# EAGLE board buzzer2 (EAGLE 9.5.2)
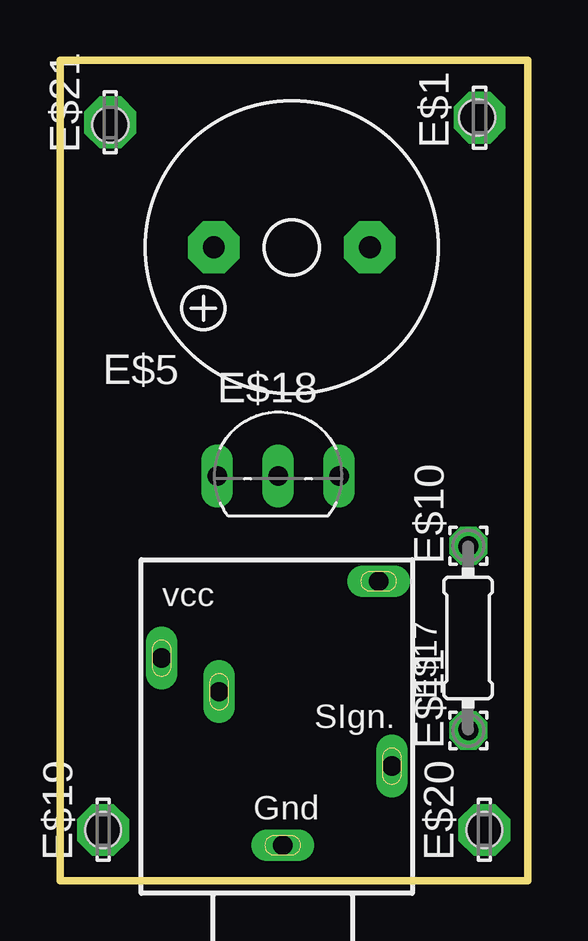
[diagram p0: board, top side]
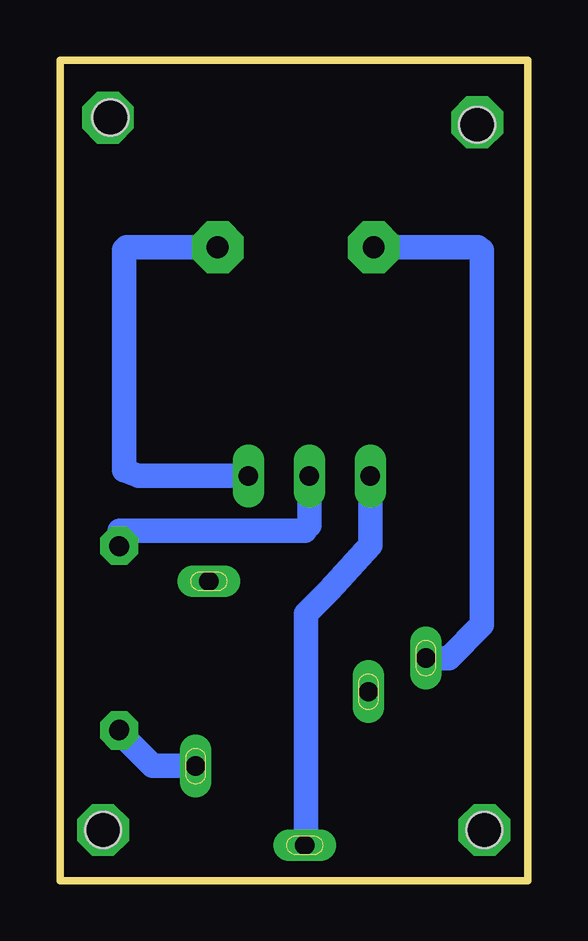
[diagram p1: board, bottom side, seen from below]

Size 19.5 x 34.2 mm. Coordinates in mm from the lower left corner, seen from the top.
Outline: 19.5,0 0,0 0,34.2 19.5,34.2 19.5,0
Copper layers (1*16): Top 0.035mm / dielectric 1.5mm / Bottom 0.035mm
Design rules "default": minimum track width 10mil, minimum drill 24mil, track to track 8mil, track to pad 8mil, pad to pad 8mil, via to via 8mil, smd to smd 8mil, copper to edge 40mil, drill to drill 8mil, minimum pad ring 10mil, minimum via ring 8mil, stop-mask expansion 4mil, vias tented up to drill 0mil, thermal gap 10mil
Holes 1.5 mm at 1.8,2.12 17.4,31.8 17.7,2.12 2.1,31.5

## Footprints (pad centres in the part's own frame; a part is rotated, then mirrored left to right if it is on the bottom)
LSP11 = drill 1.118 pad 2.159 octagon: MP 0,0
1503_09 = drill 0.8 pad 1.2 long: 1 0,-2.1; 2 -4.55,-5.4; 3 5.05,-9.9; 4 -4,-13.1; 5 2.65,-8.5
F/QMX = drill 0.914 pad 2.159 octagon: + 3.251,0; - -3.251,0
1,6/0,8 = drill 0.813 pad 1.6 octagon: 1 0,0
0204/7 = drill 0.813 octagon: 1 -3.81,0; 2 3.81,0
TO92- = drill 0.813 long: 1 2.54,0; 2 0,0; 3 -2.54,0

## Placement (x,y rotation side)
E$1  [LSP11]  17.5,31.8 90 top
E$2  [1503_09]  9.29,-0.62 180 top
E$5  BUZZER  [F/QMX]  9.67,26.4 180 top
E$10  [1,6/0,8]  17.03,13.96 90 top
E$11  [1,6/0,8]  17.03,6.27 90 top
E$17  180  [0204/7]  17.02,10.12 90 top
E$18  2n5551  [TO92-]  9.1,16.87 0 top
E$19  [LSP11]  1.8,2.12 90 top
E$20  [LSP11]  17.7,2.12 90 top
E$21  [LSP11]  2.1,31.6 90 top

## Library data of the parts
E$1 E$19-E$21 = solpad
E$2 = con-lumberg
E$5 = buzzer
E$10 E$11 = wirepad
E$17 = eagle-ltspice
E$18 = transistor-fet

## Nets
S$2: E$2.2 E$17.1
S$7: E$17.2 E$18.2
S$8: E$5.- E$18.1
S$10: E$2.3 E$5.+
S$11: E$2.1 E$18.3

## Tracks (layer width: path | path; a pad name or v marks a point on that pad's centre or on a via)
S$2
  Bottom 0.254: 14.04,4.8 E$2.2 | 17.01,6.17 E$17.1
  Bottom 1.016: 14.04,4.8 15.64,4.8 17.01,6.17
S$7
  Bottom 0.813: 17.02,14.54 17,14.58 | 9.28,14.58 9.1,14.82
  Bottom 1.016: 9.28,14.58 17,14.58 | 17.02,14.54 E$17.2 | 9.1,14.82 E$18.2
S$8
  Bottom 0.813: 16.83,26.29 16.73,26.4
  Bottom 1.016: E$5.- 16.73,26.4 | 16.83,26.29 16.83,17.12 16.22,16.87 E$18.1
S$10
  Bottom 0.813: 2.06,26.4 1.9,26.28
  Bottom 1.016: 1.9,26.28 1.9,10.67 3.29,9.28 E$2.3 | 2.06,26.4 E$5.+
S$11
  Bottom 1.016: E$2.1 9.24,1.6 9.24,11.14 8.29,12.09 6.56,13.98 E$18.3

## Text on the board
tPlace: vcc | SIgn. | Gnd
tTest: V | G | V | S
bTest: S | G